# EAGLE board 24x16_RGB (EAGLE 6.4)
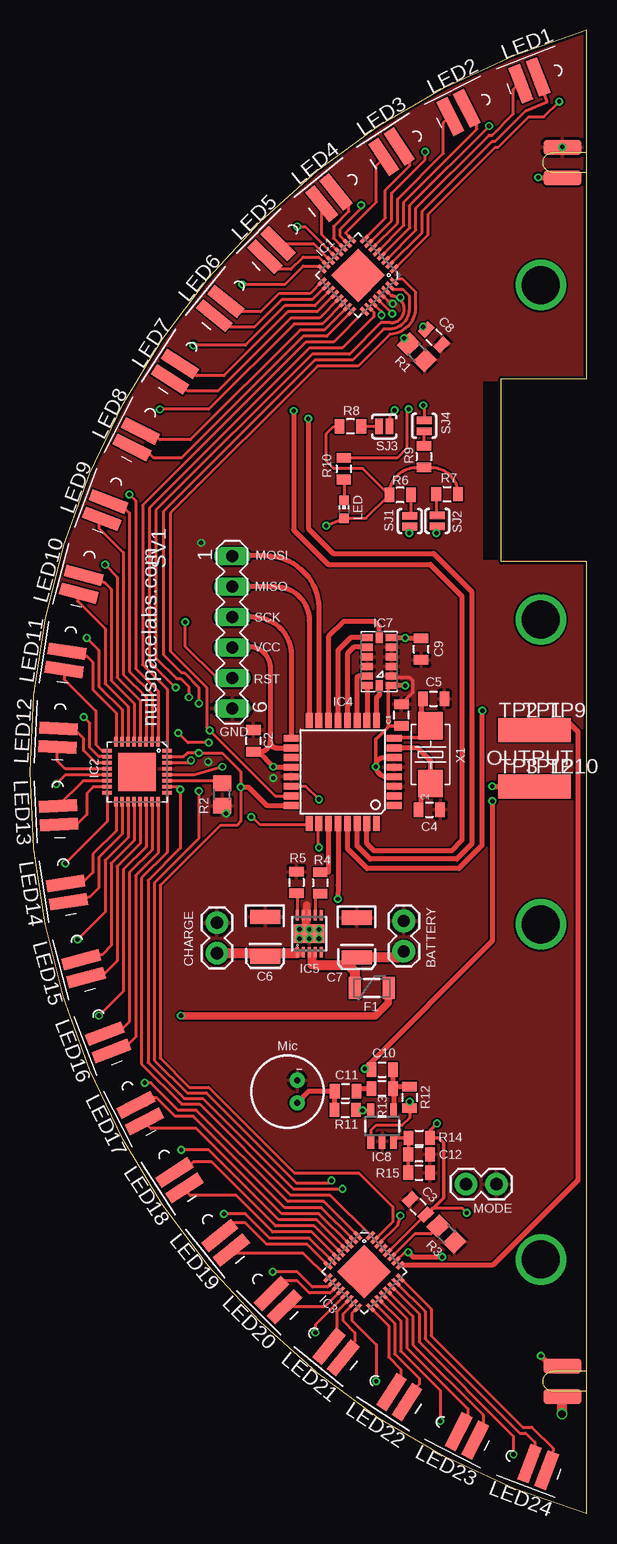
[diagram p0: board, top side]
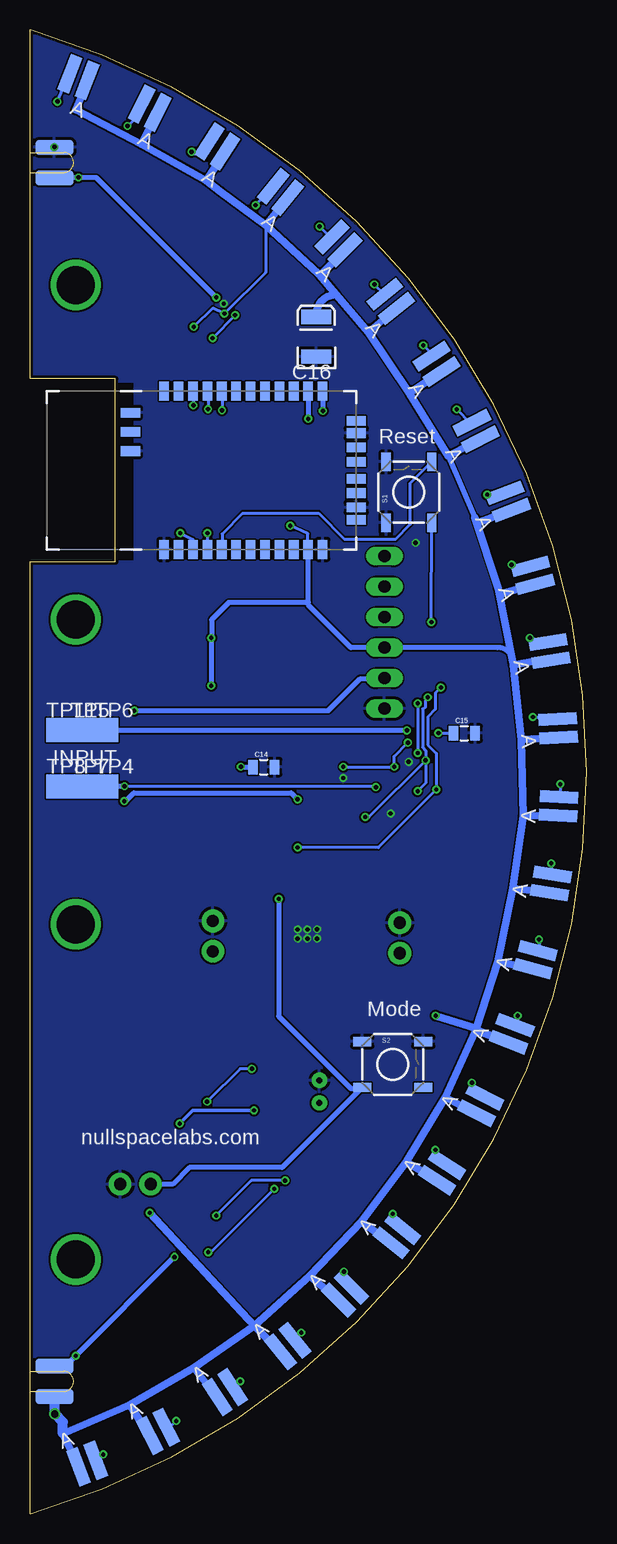
[diagram p1: board, bottom side, seen from below]

Size 46.39 x 123.7 mm. Coordinates in mm from the lower left corner, seen from the top.
Outline: 46.39,0 arc-147 46.39,123.7 46.39,94.61 39.27,94.61 39.27,79.38 46.39,79.38 46.39,0
Copper layers (1*16): Top 0.035mm / dielectric 1.5mm / Bottom 0.035mm
Design rules "ITead_rule": minimum track width 6mil, minimum drill 12mil, track to track 6mil, track to pad 6mil, pad to pad 6mil, via to via 6mil, smd to smd 0mil, copper to edge 10mil, drill to drill 10mil, minimum pad ring 10mil, minimum via ring 6mil, stop-mask expansion 2mil, vias tented up to drill 100mil, thermal gap 10mil

## Footprints (pad centres in the part's own frame; a part is rotated, then mirrored left to right if it is on the bottom)
1X02 = drill 1.016 pad 1.88: 1 0,0; 2 2.54,0
0805 = smd 0.8 x 1.2: 1 -0.9,0; 2 0.9,0
EIA3528 = smd 1.2 x 2.5: A 1.65,0; C -1.65,0
PTC-1206 = smd 1 x 1.8: 1 -1.4,0; 2 1.4,0
QFN32_XLP = smd 0.285 x 0.8: 1 -1.75,-2.5; 2 -1.25,-2.5; 3 -0.75,-2.5; 4 -0.25,-2.5; 5 0.25,-2.5; 6 0.75,-2.5; 7 1.25,-2.5; 8 1.75,-2.5; 17 1.75,2.5; 18 1.25,2.5; 19 0.75,2.5; 20 0.25,2.5; 21 -0.25,2.5; 22 -0.75,2.5; 23 -1.25,2.5; 24 -1.75,2.5 | smd 0.8 x 0.285: 9 2.5,-1.75; 10 2.5,-1.25; 11 2.5,-0.75; 12 2.5,-0.25; 13 2.5,0.25; 14 2.5,0.75; 15 2.5,1.25; 16 2.5,1.75; 25 -2.5,1.75; 26 -2.5,1.25; 27 -2.5,0.75; 28 -2.5,0.25; 29 -2.5,-0.25; 30 -2.5,-0.75; 31 -2.5,-1.25; 32 -2.5,-1.75 | smd 3.15 x 3.15: EP 0,0
TQFP32-08 = smd 1.27 x 0.559: 1 -4.293,2.8; 2 -4.293,2; 3 -4.293,1.2; 4 -4.293,0.4; 5 -4.293,-0.4; 6 -4.293,-1.2; 7 -4.293,-2; 8 -4.293,-2.8; 17 4.293,-2.8; 18 4.293,-2; 19 4.293,-1.2; 20 4.293,-0.4; 21 4.293,0.4; 22 4.293,1.2; 23 4.293,2; 24 4.293,2.8 | smd 0.559 x 1.27: 9 -2.8,-4.293; 10 -2,-4.293; 11 -1.2,-4.293; 12 -0.4,-4.293; 13 0.4,-4.293; 14 1.2,-4.293; 15 2,-4.293; 16 2.8,-4.293; 25 2.8,4.293; 26 2,4.293; 27 1.2,4.293; 28 0.4,4.293; 29 -0.4,4.293; 30 -1.2,4.293; 31 -2,4.293; 32 -2.8,4.293
DFN10_3X3 = smd 0.3 x 0.85: 1 -1,-1.55; 2 -0.5,-1.55; 3 0,-1.55; 4 0.5,-1.55; 5 1,-1.55; 6 1,1.55; 7 0.5,1.55; 8 0,1.55; 9 -0.5,1.55; 10 -1,1.55 | smd 2.48 x 1.55: EXP 0,0
RN41 = smd 0.8 x 1.6: 1 -6.6,-6.6; 2 -5.4,-6.6; 3 -4.2,-6.6; 4 -3,-6.6; 5 -1.8,-6.6; 6 -0.6,-6.6; 7 0.6,-6.6; 8 1.8,-6.6; 9 3,-6.6; 10 4.2,-6.6; 11 5.4,-6.6; 12 6.6,-6.6; 13 6.6,6.6; 14 5.4,6.6; 15 4.2,6.6; 16 3,6.6; 17 1.8,6.6; 18 0.6,6.6; 19 -0.6,6.6; 20 -1.8,6.6; 21 -3,6.6; 22 -4.2,6.6; 23 -5.4,6.6; 24 -6.6,6.6 | smd 1.6 x 0.8: 25 -9.4,4.8; 26 -9.4,3.2; 27 -9.4,1.6; 28 9.4,3.1; 29 9.4,-3.1; 30 9.4,-4.122; 31 9.4,-1.9; 32 9.4,-0.7; 33 9.4,0.7; 34 9.4,1.9; 35 9.4,4.122
LGA-14 = smd 0.6 x 0.9: 1 -2,-1; 2 -1.2,-1; 3 -0.4,-1; 4 0.4,-1; 5 1.2,-1; 6 2,-1; 8 2,1; 9 1.2,1; 10 0.4,1; 11 -0.4,1; 12 -1.2,1; 13 -2,1 | smd 0.9 x 0.6: 7 2,0; 14 -2,0
SOT23-5 = smd 0.55 x 1.2: 1 -0.95,-1.3; 2 0,-1.3; 3 0.95,-1.3; 4 0.95,1.3; 5 -0.95,1.3
CHIP-LED0603 = smd 0.8 x 0.8: A 0,-0.75; C 0,0.75
LED5MM_RGB_EDGE = smd 1 x 3.175 bottom: A -0.385,-1.6; B 1.155,-1.6 | smd 1 x 3.175: G 0.385,-1.6; R -1.155,-1.6
MIC-6MM = drill 0.5 pad 1.27: 1 -0.8,0.95; 2 -0.8,-0.95
R0805 = smd 1.3 x 1.5: 1 -0.95,0; 2 0.95,0
TACTILE_SWITCH_SMD = smd 1.524 x 0.762: 1 -2.54,1.905; 2 2.54,1.905; 3 -2.54,-1.905; 4 2.54,-1.905
SJ_2S-NO = smd 0.635 x 1.27: 1 -0.45,0; 2 0.45,0
SLOT = smd 3.175 x 1.27: P$1 2.032,1.27; P$2 2.032,-1.27 | smd 3.175 x 1.27 bottom: P$3 2.032,1.27; P$4 2.032,-1.27
MA06-1 = drill 1.016 long: 1 -6.35,0; 2 -3.81,0; 3 -1.27,0; 4 1.27,0; 5 3.81,0; 6 6.35,0
TP20SQ = smd 2 x 2: TP 0,0
5032 = smd 2.286 x 2.032: 1 -2.413,0; 2 2.413,0

## Placement (x,y rotation side)
BATTERY  [1X02]  31.15,49.43 270 top
C1  .1uF  [0805]  30.94,66.6 90 top
C2  .1uF  [0805]  18.62,64.44 90 top
C3  .1uF  [0805]  32.34,25.59 135 top
C4  18pF  [0805]  33.28,58.7 0 top
C5  18pF  [0805]  33.64,67.94 0 top
C6  4.7uF  [EIA3528]  19.59,48.11 270 top
C7  4.7uF  [EIA3528]  27.24,48.03 270 top
C8  .1uF  [0805]  33.66,98.09 315 top
C9  [0805]  32.59,72.09 90 top
C10  100pF  [0805]  29.34,37.03 0 top
C11  .1uF  [0805]  26.3,35.23 0 top
C12  1uF  [0805]  32.42,29.97 180 top
C14  .1uF  [0805]  26.91,62.26 0 bottom
C15  .1uF  [0805]  10.19,65.07 0 bottom
C16  4.7uF  [EIA3528]  22.54,98.12 90 bottom
CHARGE  [1X02]  15.58,49.28 270 top
F1  1206L150/12SLYR  [PTC-1206]  28.48,43.84 0 top
IC1  TLC5947XLP  [QFN32_XLP]  27.34,103.25 135 top
IC2  TLC5947XLP  [QFN32_XLP]  8.92,61.85 180 top
IC3  TLC5947XLP  [QFN32_XLP]  27.84,20.19 225 top
IC4  MEGA8-AI  [TQFP32-08]  26.07,61.85 180 top
IC5  MCP73123  [DFN10_3X3]  23.27,48.36 0 top
IC6  BLUETOOTH-RN41"  [RN41]  28.61,87 0 bottom
IC7  MMA7455L  [LGA-14]  29.11,71.04 90 top
IC8  OPA344  [SOT23-5]  29.34,32.33 0 top
LED  [CHIP-LED0603]  26.17,83.74 0 top
LED1  GM1WA55311A5MM_RGB_EDGE  [LED5MM_RGB_EDGE]  41.41,121.13 21 top
LED2  GM1WA55311A5MM_RGB_EDGE  [LED5MM_RGB_EDGE]  35.34,118.43 27 top
LED3  GM1WA55311A5MM_RGB_EDGE  [LED5MM_RGB_EDGE]  29.58,115.11 33 top
LED4  GM1WA55311A5MM_RGB_EDGE  [LED5MM_RGB_EDGE]  24.21,111.2 39 top
LED5  GM1WA55311A5MM_RGB_EDGE  [LED5MM_RGB_EDGE]  19.26,106.75 45 top
LED6  GM1WA55311A5MM_RGB_EDGE  [LED5MM_RGB_EDGE]  14.84,101.79 51 top
LED7  GM1WA55311A5MM_RGB_EDGE  [LED5MM_RGB_EDGE]  10.96,96.41 57 top
LED8  GM1WA55311A5MM_RGB_EDGE  [LED5MM_RGB_EDGE]  7.61,90.65 63 top
LED9  GM1WA55311A5MM_RGB_EDGE  [LED5MM_RGB_EDGE]  4.91,84.6 69 top
LED10  GM1WA55311A5MM_RGB_EDGE  [LED5MM_RGB_EDGE]  2.83,78.28 75 top
LED11  GM1WA55311A5MM_RGB_EDGE  [LED5MM_RGB_EDGE]  1.45,71.78 81 top
LED12  GM1WA55311A5MM_RGB_EDGE  [LED5MM_RGB_EDGE]  0.75,65.17 87 top
LED13  GM1WA55311A5MM_RGB_EDGE  [LED5MM_RGB_EDGE]  0.75,58.53 93 top
LED14  GM1WA55311A5MM_RGB_EDGE  [LED5MM_RGB_EDGE]  1.45,51.92 99 top
LED15  GM1WA55311A5MM_RGB_EDGE  [LED5MM_RGB_EDGE]  2.83,45.42 105 top
LED16  GM1WA55311A5MM_RGB_EDGE  [LED5MM_RGB_EDGE]  4.88,39.09 111 top
LED17  GM1WA55311A5MM_RGB_EDGE  [LED5MM_RGB_EDGE]  7.59,33.02 117 top
LED18  GM1WA55311A5MM_RGB_EDGE  [LED5MM_RGB_EDGE]  10.91,27.26 123 top
LED19  GM1WA55311A5MM_RGB_EDGE  [LED5MM_RGB_EDGE]  14.82,21.89 129 top
LED20  GM1WA55311A5MM_RGB_EDGE  [LED5MM_RGB_EDGE]  19.26,16.95 135 top
LED21  GM1WA55311A5MM_RGB_EDGE  [LED5MM_RGB_EDGE]  24.21,12.5 141 top
LED22  GM1WA55311A5MM_RGB_EDGE  [LED5MM_RGB_EDGE]  29.58,8.59 147 top
LED23  GM1WA55311A5MM_RGB_EDGE  [LED5MM_RGB_EDGE]  35.34,5.27 153 top
LED24  GM1WA55311A5MM_RGB_EDGE  [LED5MM_RGB_EDGE]  41.41,2.57 159 top
MIC1  MIC6MM  [MIC-6MM]  21.47,35.2 180 top
MODE  [1X02]  38.87,27.48 180 top
R1  20K  [R0805]  32.24,96.83 135 top
R2  20K  [R0805]  16.01,59.97 90 top
R3  20K  [R0805]  34.69,23.32 135 top
R4  1K  [0805]  24.19,52.6 270 top
R5  1.5K  [0805]  22.21,52.63 270 top
R6  1k  [0805]  30.84,84.94 180 top
R7  1k  [0805]  34.75,85.01 0 top
R8  1k  [0805]  26.7,90.65 180 top
R9  1k  [0805]  32.82,88.14 270 top
R10  220  [0805]  26.14,87.12 270 top
R11  2.2k  [0805]  26.27,33.68 0 top
R12  100K  [0805]  31.63,34.72 270 top
R13  1k  [0805]  29.34,35.46 180 top
R14  10k  [0805]  32.44,31.34 0 top
R15  10k  [0805]  32.42,28.45 0 top
S1  [TACTILE_SWITCH_SMD]  14.81,85.17 90 bottom
S2  [TACTILE_SWITCH_SMD]  16.16,37.46 0 bottom
SJ1  SOLDERJUMPERNO  [SJ_2S-NO]  31.65,82.75 90 top
SJ2  SOLDERJUMPERNO  [SJ_2S-NO]  33.94,82.78 90 top
SJ3  SOLDERJUMPERNO  [SJ_2S-NO]  29.52,90.65 180 top
SJ4  SOLDERJUMPERNO  [SJ_2S-NO]  32.85,90.7 270 top
SLOT1  SLOT  [SLOT]  46.39,11.05 180 top
SLOT2  SLOT  [SLOT]  46.39,112.65 180 top
SV1  [MA06-1]  16.85,73.48 270 top
TP1  TPTP20SQ  [TP20SQ]  42.04,65.33 0 top
TP2  TPTP20SQ  [TP20SQ]  40.04,65.33 0 top
TP3  TPTP20SQ  [TP20SQ]  40.04,60.66 0 top
TP4  TPTP20SQ  [TP20SQ]  40.04,60.66 0 bottom
TP5  TPTP20SQ  [TP20SQ]  42.04,65.33 0 bottom
TP6  TPTP20SQ  [TP20SQ]  40.04,65.33 0 bottom
TP7  TPTP20SQ  [TP20SQ]  42.04,60.66 0 bottom
TP8  TPTP20SQ  [TP20SQ]  44.02,60.66 0 bottom
TP9  TPTP20SQ  [TP20SQ]  44.05,65.33 0 top
TP10  TPTP20SQ  [TP20SQ]  44.05,60.66 0 top
TP11  TPTP20SQ  [TP20SQ]  44.05,65.33 0 bottom
TP12  TPTP20SQ  [TP20SQ]  42.04,60.66 0 top
X1  16Mhz  [5032]  33.38,63.3 270 top

## Library data of the parts
BATTERY C8-C12 CHARGE F1 IC8 R6-R15 S1 S2 SJ1-SJ4 = SparkFun
C1-C7 C14-C16 IC1-IC3 MIC1 R4 R5 = slice_noshift
IC4 = atmel; MPN: ATMEGA8-16AU; OC_FARNELL: 9171371; OC_NEWARK: 73M8863
IC5 MODE = 24x16_RGB
IC6 = NSL_Mini_Quad
IC7 = MMA7455Lbreakoutboard-v1a
LED = led
LED1-LED24 = 16x16_RGB
R1-R3 = rcl
SLOT1 SLOT2 = slice
SV1 = NSL
TP1-TP12 = testpad
X1 = NSL_MiniQuad

## Nets
!CS: IC4.14 IC7.7
BATTSENSE: IC4.1
BLANK: IC1.30 IC2.30 IC3.30 IC4.25 SLOT2.P$1 SLOT2.P$3
BT_RST: IC6.5 S1.4
BUTTON: IC4.28 MODE.2 S2.3
CHARGE: C6.A CHARGE.2 IC5.1 IC5.2
COL1: IC1.1 LED1.B
COL2: IC1.2 LED1.G
COL3: IC1.3 LED1.R
COL4: IC1.4 LED2.B
COL5: IC1.5 LED2.G
COL6: IC1.6 LED2.R
COL7: IC1.7 LED3.B
COL8: IC1.8 LED3.G
COL9: IC1.9 LED3.R
COL10: IC1.10 LED4.B
COL11: IC1.11 LED4.G
COL12: IC1.12 LED4.R
COL13: IC1.13 LED5.B
COL14: IC1.14 LED5.G
COL15: IC1.15 LED5.R
COL16: IC1.16 LED6.B
COL17: IC1.17 LED6.G
COL18: IC1.18 LED6.R
COL19: IC1.19 LED7.B
COL20: IC1.20 LED7.G
COL21: IC1.21 LED7.R
COL22: IC1.22 LED8.B
COL23: IC1.23 LED8.G
COL24: IC1.24 LED8.R
COL25: IC2.1 LED9.B
COL26: IC2.2 LED9.G
COL27: IC2.3 LED9.R
COL28: IC2.4 LED10.B
COL29: IC2.5 LED10.G
COL30: IC2.6 LED10.R
COL31: IC2.7 LED11.B
COL32: IC2.8 LED11.G
COL33: IC2.9 LED11.R
COL34: IC2.10 LED12.B
COL35: IC2.11 LED12.G
COL36: IC2.12 LED12.R
COL37: IC2.13 LED13.B
COL38: IC2.14 LED13.G
COL39: IC2.15 LED13.R
COL40: IC2.16 LED14.B
COL41: IC2.17 LED14.G
COL42: IC2.18 LED14.R
COL43: IC2.19 LED15.B
COL44: IC2.20 LED15.G
COL45: IC2.21 LED15.R
COL46: IC2.22 LED16.B
COL47: IC2.23 LED16.G
COL48: IC2.24 LED16.R
COL49: IC3.1 LED17.B
COL50: IC3.2 LED17.G
COL51: IC3.3 LED17.R
COL52: IC3.4 LED18.B
COL53: IC3.5 LED18.G
COL54: IC3.6 LED18.R
COL55: IC3.7 LED19.B
COL56: IC3.8 LED19.G
COL57: IC3.9 LED19.R
COL58: IC3.10 LED20.B
COL59: IC3.11 LED20.G
COL60: IC3.12 LED20.R
COL61: IC3.13 LED21.B
COL62: IC3.14 LED21.G
COL63: IC3.15 LED21.R
COL64: IC3.16 LED22.B
COL65: IC3.17 LED22.G
COL66: IC3.18 LED22.R
COL67: IC3.19 LED23.B
COL68: IC3.20 LED23.G
COL69: IC3.21 LED23.R
COL70: IC3.22 LED24.B
COL71: IC3.23 LED24.G
COL72: IC3.24 LED24.R
GND: BATTERY.1 C1.2 C2.2 C3.2 C4.2 C5.2 C6.C C7.C C8.2 C9.1 C12.1 C14.2 C15.2 C16.C CHARGE.1 IC1.29 IC2.29 IC3.29 IC4.3 IC4.5 IC4.21 IC5.8 IC5.9 IC5.EXP IC6.1 IC6.12 IC6.25 IC6.27 IC6.28 IC6.29 IC7.2 IC7.3 IC7.4 IC7.5 IC7.10 IC7.11 IC8.2 MIC1.2 MODE.1 R1.1 R2.1 R3.1 R5.1 R15.2 S1.1 S1.2 S2.1 S2.2 SLOT2.P$2 SLOT2.P$4 SV1.6
HOLE: IC1.27 R1.2
INT1/DRDY: IC4.13 IC7.8
INT2: IC4.12 IC7.9
MIC: C10.1 IC4.22 IC8.1 R12.2
MISO: IC4.16 SV1.2
MOSI: IC4.15 SV1.1
N$1: IC5.7 R4.2
N$2: IC2.27 R2.2
N$3: IC1.25 IC2.32
N$4: LED.C R10.2
N$5: R6.1 SJ1.2
N$6: IC5.10 R5.2
N$7: C4.1 IC4.7 X1.2
N$8: C5.1 IC4.8 X1.1
N$9: IC3.27 R3.2
N$14: C11.2 R13.2
N$15: C11.1 MIC1.1 R11.1
N$16: C12.2 IC8.3 R14.1 R15.1
N$17: C10.2 IC8.4 R12.1 R13.1
N$21: R8.1 SJ3.2
N$23: R7.1 SJ2.2
N$24: R9.1 SJ4.2
N$35: IC2.25 IC3.32
PIO3: IC6.20 SJ3.1
PIO4: IC6.22 SJ4.1
PIO5: IC6.21 R10.1
PIO6: IC6.3 SJ2.1
PIO7: IC6.4 SJ1.1
RST: IC4.29 S1.3 SV1.5
RX: IC4.30 IC6.14
SCK: IC4.17 SV1.3
SCL/SPC: IC4.10 IC7.13
SCLK: IC1.31 IC2.31 IC3.31 IC4.24 TP3.TP TP4.TP TP7.TP TP8.TP TP10.TP TP12.TP
SDA/SDI/SDO: IC4.11 IC7.12
SDO: IC4.9 IC7.14
SIN: IC1.32 IC4.23 TP5.TP TP6.TP TP11.TP
SOUT: IC3.25 TP1.TP TP2.TP TP9.TP
STAT: IC4.27 R4.1
TX: IC4.31 IC6.13
VBAT: BATTERY.2 C7.A F1.1 IC5.3 IC5.4
VCC: C1.1 C2.1 C3.1 C8.1 C9.2 C14.1 C15.1 C16.A F1.2 IC1.28 IC2.28 IC3.28 IC4.4 IC4.6 IC4.18 IC4.20 IC6.11 IC7.1 IC7.6 IC8.5 LED1.A LED2.A LED3.A LED4.A LED5.A LED6.A LED7.A LED8.A LED9.A LED10.A LED11.A LED12.A LED13.A LED14.A LED15.A LED16.A LED17.A LED18.A LED19.A LED20.A LED21.A LED22.A LED23.A LED24.A LED.A R6.2 R7.2 R8.2 R9.2 R11.2 R14.2 SLOT1.P$1 SLOT1.P$3 SV1.4
VSENSE: IC4.19
XLAT: IC1.26 IC2.26 IC3.26 IC4.26 SLOT1.P$2 SLOT1.P$4

## Tracks (layer width: path | path; a pad name or v marks a point on that pad's centre or on a via)
!CS
  Top 0.406: IC4.14 24.87,73.13 26.14,74.4 28.73,74.4 29.11,74.02 IC7.7
BLANK  (via drill 0.36)
  Top 0.254: v13.24,68.07 13.24,68.96 12.58,69.62 12.22,69.62 10.5,71.35 10.5,83.67 23.5,96.67 26.63,96.67 29.24,99.29 30.05,99.29 arc177 30.11,101.55 30.1,101.55 | v13.42,62.81 13.4,62.6 IC2.30 | IC3.30 30.62,24.03 v30.87,24.87 | v25.13,27.79 24.95,27.61 22.18,27.61 14.69,35.1 13.09,35.1 10.37,37.82 10.37,52.6 14.08,56.31 v14.08,60.25 | IC4.25 23.19,57.48 19.13,57.48 18.52,58.09 v18.45,58.09 | 30.1,101.55 IC1.30 | 30.1,101.55 30.1,101.57 v30.87,101.4 | 44.33,111.4 SLOT2.P$3
  Top 0.406: v42.35,111.4 44.33,111.4
  Bottom 0.254: v13.42,62.81 18.14,58.09 v18.45,58.09 | v14.08,60.25 13.42,60.91 v13.42,62.81 | v25.13,27.79 27.95,27.79 v30.87,24.87 | v42.35,111.4 42.37,111.38 | v13.24,68.07 13.44,67.79 13.44,67.26 13.67,67.11 13.67,63.91 13.42,63.65 v13.42,62.81
  Bottom 0.406: v30.87,101.4 40.87,111.4 v42.35,111.4 | 42.37,111.38 SLOT2.P$3
BT_RST
  Bottom 0.254: S1.4 14.69,85.93 14.69,82.5 15.91,81.28 20.2,81.28 22.33,83.41 28.66,83.41 30.38,81.69 30.38,80.42
  Bottom 0.305: 30.38,80.42 IC6.5
BUTTON  (via drill 0.36)
  Top 0.406: IC4.28 25.67,52.41 v25.66,51.26
  Bottom 0.254: 18.65,35.46 S2.3
  Bottom 0.406: v25.66,51.26 25.66,41.48 19.64,35.46 18.65,35.46 | S2.3 25.38,28.88 33.1,28.88 34.5,27.48 MODE.2
CHARGE
  Top 0.254: IC5.1 21.92,46.46 C6.A
  Top 0.305: IC5.2 IC5.1 22.27,46.74
  Top 0.813: 22.27,46.74 CHARGE.2
COL1  (via drill 0.36)
  Top 0.254: IC1.1 33.18,106.62 33.18,108.33 38.77,113.92 39.02,113.92 41.56,116.46 42.83,116.46 v44.1,117.73
  Bottom 0.254: v44.1,117.73 LED1.B
COL2
  Top 0.254: IC1.2 32.67,106.82 32.67,108.58 38.51,114.43 38.77,114.43 41.31,116.97 43.08,117.73 42.83,118.49 42.34,118.98 LED1.G
COL3
  Top 0.254: IC1.3 32.16,107.02 32.16,108.84 38.26,114.94 38.51,114.94 40.29,116.71 40.29,118.75 40.77,119.22 LED1.R
COL4  (via drill 0.36)
  Top 0.254: IC1.4 31.65,107.22 31.65,109.09 v38.26,115.7
  Bottom 0.254: v38.26,115.7 37.09,116.86 LED2.B
COL5
  Top 0.254: IC1.5 31.15,107.41 31.15,109.35 37.24,115.44 37.24,115.7 36.41,116.53 LED2.G
COL6
  Top 0.254: IC1.6 30.64,107.61 30.64,109.6 34.45,113.41 34.45,115.95 34.97,116.48 LED2.R
COL7  (via drill 0.36)
  Top 0.254: IC1.7 30.13,107.81 30.13,110.11 32.92,112.9 v32.92,113.54
  Bottom 0.254: LED3.B 32.42,113.4 32.78,113.4 v32.92,113.54
COL8
  Top 0.254: IC1.8 29.62,108.01 29.62,110.36 31.65,112.39 31.65,112.65 30.78,113.53 LED3.G
COL9
  Top 0.254: IC1.9 26.32,106.74 26.32,106.81 28.86,109.35 28.86,112.39 29.48,113.02 LED3.R
COL10  (via drill 0.36)
  Top 0.254: IC1.10 25.81,106.54 25.81,107.06 27.59,108.84 v27.59,109.09
  Bottom 0.254: 26.11,110.32 LED4.B v27.59,109.09
COL11
  Top 0.254: IC1.11 25.3,106.34 25.3,107.31 26.57,108.58 26.57,109.09 25.51,110.16 LED4.G
COL12
  Top 0.254: IC1.12 24.31,106.63 LED4.R
COL13  (via drill 0.36)
  Top 0.254: IC1.13 22.92,107.31 v22.26,107.31
  Bottom 0.254: v22.26,107.31 21.38,106.44 LED5.B
COL14
  Top 0.254: IC1.14 23.64,105.89 LED5.G
COL15
  Top 0.254: IC1.15 24.04,104.78 22.76,104.78 21.75,103.76 20.73,103.76 19.69,104.8 LED5.R
COL16  (via drill 0.36)
  Top 0.254: IC1.16 24.1,104.01 22.76,104.01 21.24,102.49 v17.68,102.49
  Bottom 0.254: v17.68,102.49 16.9,101.7 LED6.B
COL17
  Top 0.254: IC1.17 23.34,101.73 20.73,101.73 19.21,100.2 17.43,100.2 16.53,101.1 LED6.G
COL18
  Top 0.254: IC1.18 23.54,101.22 20.99,101.22 18.7,98.93 16.67,98.93 15.7,99.91 LED6.R
COL19  (via drill 0.36)
  Top 0.254: IC1.19 23.74,100.71 21.24,100.71 17.94,97.41 v13.62,97.41
  Bottom 0.254: v13.62,97.41 12.88,96.67 LED7.B
COL20
  Top 0.254: IC1.20 23.94,100.2 21.49,100.2 16.16,94.87 13.87,94.87 12.86,95.88 LED7.G
COL21
  Top 0.254: IC1.21 24.13,99.69 21.75,99.69 15.65,93.6 13.11,93.6 12.12,94.59 LED7.R
COL22  (via drill 0.36)
  Top 0.254: IC1.22 24.33,99.19 22,99.19 14.89,92.07 v10.83,92.07
  Bottom 0.254: v10.83,92.07 9.73,90.98 LED8.B
COL23
  Top 0.254: IC1.23 24.53,98.68 22.51,98.68 13.37,89.53 10.83,89.53 10.07,90.29 LED8.G
COL24
  Top 0.254: IC1.24 24.73,98.17 22.76,98.17 12.6,88.01 10.32,88.01 9.41,88.92 LED8.R
COL25  (via drill 0.36)
  Top 0.254: IC2.1 10.67,68.61 8.79,70.48 8.79,84.45 v8.29,84.96
  Bottom 0.254: v8.29,84.96 6.94,84.96 LED9.B
COL26
  Top 0.254: IC2.2 10.17,68.35 8.29,70.23 8.29,83.44 7.78,83.95 6.96,83.95 LED9.G
COL27
  Top 0.254: IC2.3 9.67,68.08 7.78,69.98 7.78,80.14 5.75,82.17 5.75,82.74 LED9.R
COL28  (via drill 0.36)
  Top 0.254: IC2.4 9.17,67.82 7.27,69.72 7.27,78.1 v6.25,79.12
  Bottom 0.254: v6.25,79.12 6.12,78.98 LED10.B
COL29
  Top 0.254: IC2.5 8.67,67.56 6.76,69.47 6.76,77.09 6.25,77.6 LED10.G
COL30
  Top 0.254: IC2.6 8.17,67.3 6.25,69.22 6.25,73.79 3.97,76.07 3.97,76.64 LED10.R
COL31  (via drill 0.36)
  Top 0.254: IC2.7 7.67,67.04 5.75,68.96 5.75,72.01 v4.73,73.02
  Bottom 0.254: LED11.B v4.73,73.02
COL32
  Top 0.254: IC2.8 7.17,66.77 5.24,68.71 5.24,70.99 4.73,71.5 3.5,71.5 LED11.G
COL33
  Top 0.254: IC2.9 6.03,63.6 5.49,64.13 5.49,66.93 2.85,69.57 LED11.R
COL34  (via drill 0.36)
  Top 0.254: IC2.10 6.4,63.12 5.75,63.12 4.98,63.88 4.98,65.91 v4.48,66.42
  Bottom 0.254: v4.48,66.42 2.59,66.42 LED12.B
COL35
  Top 0.254: LED12.G 2.44,65.41 3.71,65.41 4.48,64.64 4.48,63.63 5.5,62.6 IC2.11
COL36
  Top 0.254: IC2.12 2.95,62.1 2.29,62.76 LED12.R
COL37  (via drill 0.36)
  Top 0.254: IC2.13 2.95,61.59 v2.19,60.83
  Bottom 0.254: v2.19,60.83 2.19,59.76 LED13.B
COL38
  Top 0.254: 6.42,61.09 IC2.14 4.43,61.1 LED13.G
COL39
  Top 0.254: LED13.R 3.89,57.46 4.73,58.29 4.73,60.07 5.26,60.6 IC2.15
COL40  (via drill 0.36)
  Top 0.254: IC2.16 6.42,57.7 v2.95,54.23
  Bottom 0.254: v2.95,54.23 2.95,53.41 LED14.B
COL41
  Top 0.254: IC2.17 7.17,56.92 5.24,54.99 5.24,53.47 4.48,52.7 3.13,52.7 LED14.G
COL42
  Top 0.254: IC2.18 7.67,56.66 5.75,54.74 5.75,52.2 4.98,51.43 LED14.R
COL43  (via drill 0.36)
  Top 0.254: IC2.19 8.17,56.4 6.25,54.48 6.25,50.16 v3.97,47.88
  Bottom 0.254: v3.97,47.88 3.97,47.05 LED15.B
COL44
  Top 0.254: IC2.20 8.67,56.14 6.76,54.23 6.76,47.37 6,46.61 4.68,46.61 LED15.G
COL45
  Top 0.254: IC2.21 9.17,55.88 7.27,53.97 7.27,46.1 6.25,45.08 5.05,45.08 LED15.R
COL46  (via drill 0.36)
  Top 0.254: IC2.22 9.67,55.61 7.78,53.72 7.78,43.56 v5.75,41.53
  Bottom 0.254: v5.75,41.53 5.75,40.96 LED16.B
COL47
  Top 0.254: IC2.23 10.17,55.35 8.29,53.47 8.29,41.02 7.78,40.51 6.73,40.51 LED16.G
COL48
  Top 0.254: IC2.24 10.67,55.09 8.79,53.21 8.79,39.75 8.03,38.99 7.19,38.99 LED16.R
COL49  (via drill 0.36)
  Top 0.254: IC3.1 24.48,26.03 21.49,26.03 13.87,33.66 12.35,33.66 10.06,35.94 v9.56,35.94
  Bottom 0.254: v9.56,35.94 9.56,35.84 arc-90 LED17.B
COL50
  Top 0.254: IC3.2 24.28,25.53 21.24,25.53 13.62,33.15 12.1,33.15 10.57,34.67 10.32,34.67 9.74,34.09 LED17.G
COL51
  Top 0.254: IC3.3 24.08,25.02 20.99,25.02 13.87,32.13 10.06,32.13 9.54,32.66 LED17.R
COL52  (via drill 0.36)
  Top 0.254: IC3.4 23.88,24.51 20.73,24.51 14.89,30.35 v12.6,30.35
  Bottom 0.254: v12.6,30.35 12.6,30.09 arc-90 LED18.B
COL53
  Top 0.254: IC3.5 23.68,24 20.48,24 15.14,29.34 13.62,29.34 12.74,28.46 LED18.G
COL54
  Top 0.254: IC3.6 23.48,23.49 20.22,23.49 17.18,26.54 13.37,26.54 12.88,27.03 LED18.R
COL55  (via drill 0.36)
  Top 0.254: IC3.7 23.28,22.99 19.97,22.99 17.94,25.02 v16.16,25.02
  Bottom 0.254: v16.16,25.02 16.16,24.62 arc-90 LED19.B
COL56
  Top 0.254: IC3.8 23.08,22.48 19.72,22.48 17.94,24.26 16.92,24.26 15.86,23.19 LED19.G
COL57
  Top 0.254: IC3.9 22.78,21.72 17.18,21.72 16.9,22 LED19.R
COL58  (via drill 0.36)
  Top 0.254: IC3.10 24.81,18.92 23.53,18.92 22.26,20.19 v20.22,20.19
  Bottom 0.254: v20.22,20.19 20.22,19.54 arc-90 LED20.B
COL59
  Top 0.254: IC3.11 25.01,18.41 23.27,18.41 22.26,19.43 21.24,19.43 20.16,18.35 LED20.G
COL60
  Top 0.254: IC3.12 24.56,17.26 LED20.R
COL61  (via drill 0.36)
  Top 0.254: IC3.13 23.78,15.77 v23.78,15.11
  Bottom 0.254: v23.78,15.11 24.31,14.58 LED21.B
COL62
  Top 0.254: IC3.14 25.56,16.85 25.56,15.11 24.91,14.47 LED21.G
COL63
  Top 0.254: IC3.15 26.07,16.65 26.07,16.13 27.08,15.11 27.08,14.35 26.11,13.38 LED21.R
COL64  (via drill 0.36)
  Top 0.254: IC3.16 26.83,16.7 26.83,16.13 28.86,14.1 v28.86,11.05
  Bottom 0.254: v28.86,11.05 29.35,10.56 LED22.B
COL65
  Top 0.254: IC3.17 29.88,15.69 29.88,13.08 30.89,12.06 30.89,11.3 30.13,10.54 LED22.G
COL66
  Top 0.254: IC3.18 30.38,15.88 30.38,13.33 32.42,11.3 32.42,10.79 31.42,9.8 LED22.R
COL67  (via drill 0.36)
  Top 0.254: IC3.19 30.89,16.08 30.89,13.59 34.19,10.29 v34.19,7.75
  Bottom 0.254: v34.19,7.75 34.72,7.22 LED23.B
COL68
  Top 0.254: IC3.20 31.4,16.28 31.4,13.84 36.48,8.76 36.48,8.25 35.72,7.5 LED23.G
COL69
  Top 0.254: IC3.21 31.91,16.48 31.91,14.1 37.75,8.25 37.75,7.49 37.09,6.84 LED23.R
COL70  (via drill 0.36)
  Top 0.254: IC3.22 32.42,16.68 32.42,14.35 40.29,6.48 v40.29,4.95
  Bottom 0.254: v40.29,4.95 40.77,4.47 LED24.B
COL71
  Top 0.254: IC3.23 32.92,16.88 32.92,14.6 40.8,6.73 41.31,6.73 42.07,5.97 42.07,5.46 41.62,5.02 LED24.G
COL72
  Top 0.254: IC3.24 33.43,17.08 33.43,14.86 41.05,7.24 41.81,7.24 43.59,5.46 43.59,5.21 43.06,4.68 LED24.R
GND  (via drill 0.36)
  Top 0.254: v30.23,100.89 30.05,100.89 IC1.29 | IC7.2 30.13,69.83 | 23.04,50.75 23.04,50.18 arc-90 IC5.9
  Top 0.305: C1.2 31.91,68.45 31.91,69.47 31.65,69.72 30.24,69.72 IC7.2
  Top 0.61: v23.27,48.72 22.99,49 22.99,49.43 23.04,49.48 23.04,50.75
  other vias: 16.34,58.39 14.84,62.69 22.46,48.74 24.09,48.72 22.46,47.96 23.27,47.96 24.09,47.96 44.35,113.94 14.26,80.95 20.28,61.34
  pour Top: 47.86,124.69 47.73,124.69 47.73,94.64 37.6,94.51 37.6,79.38 47.73,79.5 47.86,-1.5 -2.05,-1.47 -2.05,124.71
  pour Bottom: -3.65,127.13 -3.65,-5.49 48.29,-5.36 48.29,79.35 37.6,79.43 37.6,94.34 48.47,94.41 48.47,95.07 48.65,127.25 48.29,127.25
HOLE  (via drill 0.36)
  Top 0.254: IC1.27 29.24,100.28 v29.29,99.92 | v31.17,98.02 31.57,97.62 R1.2
  Bottom 0.254: v29.29,99.92 31.15,98.02 v31.17,98.02
INT1/DRDY
  Top 0.406: IC4.13 25.66,71.98 26.72,73.04 IC7.8
INT2
  Top 0.406: IC4.12 26.45,66.16 26.45,71.7 26.99,72.24 IC7.9
MIC  (via drill 0.36)
  Top 0.254: IC8.1 28.4,31.98 28.81,32.38 30.99,32.38 31.63,33.02 R12.2 v31.63,34.37 | v27.9,37.11 27.97,37.03 C10.1 | v24.09,59.56 23,60.65 IC4.22
  Top 0.406: v27.9,37.11 38.54,47.75 v38.54,59.41
  Bottom 0.254: v31.63,34.37 28.89,37.11 v27.9,37.11 | v38.54,59.41 38.39,59.56
  Bottom 0.406: v24.09,59.56 24.62,60.1 37.73,60.1 38.41,59.41 v38.54,59.41
MISO
  Top 0.406: IC4.16 23.27,74.5 arc90 20.48,77.29 SV1.2
MOSI
  Top 0.406: IC4.15 24.07,75.46 arc90 19.64,79.88 16.9,79.88 arc90 SV1.1
N$1
  Top 0.254: IC5.7 23.77,51.7 R4.2
N$2
  Top 0.254: IC2.27 15.83,61.1 R2.2
N$3
  Top 0.254: IC1.25 25.31,97.69 22.99,97.69 9.38,84.07 9.38,70.79 11.42,68.75 IC2.32
N$4
  Top 0.254: LED.C 26.17,86.2 R10.2
N$5
  Top 0.254: R6.1 31.74,83.29 arc-90 SJ1.2
N$6
  Top 0.254: IC5.10 22.27,51.73 R5.2
N$7
  Top 0.406: IC4.7 32.32,63.85 33.41,62.76 33.41,60.91 X1.2 33.38,60.76 32.57,59.94 32.57,58.89 C4.1
N$8
  Top 0.305: IC4.8 30.43,64.72 32.67,64.72 33.38,65.43 X1.1
  Top 0.406: IC4.8 | X1.1 33.38,65.76 32.59,66.55 32.59,67.83 C5.1
N$9
  Top 0.254: IC3.27 32.05,23.34 33.41,23.34 34.02,23.96 R3.2
N$10  (via drill 3.17)
  other vias: 42.58,21.21
N$11  (via drill 3.17)
  other vias: 42.58,49.15
N$12  (via drill 3.17)
  other vias: 42.58,102.44
N$13  (via drill 3.17)
  other vias: 42.58,74.55
N$14
  Top 0.406: C11.2 27.42,35.46 R13.2
N$15
  Top 0.406: R11.1 25.37,35.2 C11.1 23.19,35.23 MIC1.1
N$16
  Top 0.305: R15.1 C12.2 31.54,30 R14.1 30.6,31.34 IC8.3
N$17
  Top 0.406: C10.2 R13.1 | R13.1 30.41,35.62 R12.1 | R13.1 30.29,35.41 IC8.4
N$21
  Top 0.254: SJ3.2 R8.1
N$23
  Top 0.254: R7.1 33.85,83.32 arc90 SJ2.2
N$24
  Top 0.254: SJ4.2 32.82,90.23 R9.1
N$35
  Top 0.254: IC2.25 11.42,55.15 9.28,53.01 9.28,37.52 12.63,34.16 14.13,34.16 21.7,26.59 24.98,26.59 IC3.32
PIO3  (via drill 0.36)
  Top 0.254: v30.38,92 29.97,91.58 SJ3.1
  Bottom 0.254: IC6.20 30.38,93.57 v30.38,92
PIO4  (via drill 0.36)
  Top 0.254: v32.77,92.41 32.85,92.33 SJ4.1
  Bottom 0.254: IC6.22 32.77,93.56 v32.77,92.41
PIO5  (via drill 0.36)
  Top 0.254: R10.1 30.6,88.02 31.4,88.82 31.4,91.95 v31.55,92.1
  Bottom 0.254: v31.55,92.1 31.55,93.54 IC6.21
PIO6  (via drill 0.36)
  Top 0.254: SJ2.1 v33.86,81.76
  Bottom 0.254: IC6.3 32.81,81.22 arc90 32.8,81.23 v33.86,81.76
PIO7  (via drill 0.36)
  Top 0.254: v31.6,81.76 31.6,82.25 SJ1.1
  Bottom 0.254: IC6.4 v31.61,81.76 v31.6,81.76
RST  (via drill 0.36)
  Top 0.254: v12.93,74.35 12.93,72.31 15.5,69.75 16.77,69.75 SV1.5
  Top 0.406: IC4.29 26.47,55.43 28.1,53.8 35.74,53.8 37.65,55.7 37.65,66.9 v37.7,66.95
  Bottom 0.254: v12.93,74.35 S1.3
  Bottom 0.406: v37.7,66.95 21.52,66.95 18.85,69.62 16.9,69.62 SV1.5
RX  (via drill 0.36)
  Top 0.406: IC4.30 27.26,55.68 28.35,54.58 35.57,54.58 36.81,55.83 36.81,76.89 33.64,80.06 25.28,80.06 23.2,82.14 v23.2,91.29
  Bottom 0.406: v23.2,91.29 v23.21,91.3 IC6.14
SCK
  Top 0.406: IC4.17 21.77,71.6 arc90 18.6,74.78 16.87,74.78 arc90 SV1.3
SCL/SPC
  Top 0.406: IC4.10 28.11,66.19 IC7.13
SCLK  (via drill 0.36)
  Top 0.254: v14.08,67.56 14.08,68.88 12.83,70.13 12.6,70.13 11.11,71.63 11.11,83.57 23.73,96.19 26.88,96.19 29.47,98.78 29.88,98.78 arc90 31.63,100.46 31.63,101.52 31.12,102.03 30.31,102.03 30,102.34 30,102.37 IC1.31 | IC2.31 12.78,63.1 12.78,63.12 13.09,63.42 v14.08,63.42 16.01,63.42 17.56,61.87 v17.56,60.58 17.56,57.71 17.25,57.4 15.86,57.4 10.85,52.4 10.85,38 13.29,35.56 14.89,35.56 22.03,28.42 27.41,28.42 30.23,25.6 30.23,24.35 IC3.31 | TP3.TP TP12.TP TP8.TP TP10.TP
  Top 0.406: IC4.24 19.72,59.05 18.19,60.58 v17.56,60.58 | v38.51,60.65 TP3.TP
  Bottom 0.254: v38.51,60.65 17.61,60.63 arc90 v17.56,60.58 | TP3.TP TP12.TP | v14.08,67.56 v14.08,63.42
  Bottom 0.406: TP3.TP v38.51,60.65 TP8.TP
SDA/SDI/SDO
  Top 0.406: IC4.11 27.23,66.17 27.23,69.72 27.36,69.84 IC7.12
SDO
  Top 0.406: IC7.14 29.11,68.27 28.87,68.03 IC4.9
SIN  (via drill 0.36)
  Top 0.254: IC1.32 30.54,102.92 31.07,102.92 32.16,101.83 32.16,100.74 arc-90 30,98.35 27.34,95.68 23.96,95.68 11.69,83.41 11.69,71.91 14.71,68.88 14.71,65.58 v14.98,65.32 20.45,59.85 IC4.23
  Bottom 0.254: TP5.TP TP6.TP | TP5.TP TP11.TP | TP5.TP 43.02,65.33 43.02,65.32
  Bottom 0.406: v14.98,65.32 43.02,65.32
SOUT
  Top 0.254: 44.84,66.02 44.74,66.02 TP9.TP TP1.TP TP2.TP
  Top 0.406: IC3.25 38.56,20.72 45.65,27.81 45.65,65.2 44.84,66.02
STAT
  Top 0.406: IC4.27 24.87,53.5 R4.1
TX  (via drill 0.36)
  Top 0.406: IC4.31 28.07,55.88 28.68,55.27 35.11,55.27 36,56.16 36,76.5 33.36,79.15 24.85,79.15 21.98,82.02 v21.98,91.95
  Bottom 0.406: v21.98,91.95 22.01,91.98 IC6.13
VBAT
  Top 0.254: IC5.3 IC5.4 23.78,45.72 | 23.45,45.72 23.27,45.9 IC5.3 | IC5.3 23.45,46.63 23.45,45.97 23.6,46.13 23.6,46.63 23.27,46.3 23.27,45.69
  Top 0.305: IC5.3 IC5.4
  Top 0.61: 23.78,45.72 23.45,45.72
  Top 0.813: BATTERY.2 30.64,46.38 C7.A 26.57,45.72 | 26.57,45.72 23.78,45.72 | 26.57,45.72 27.08,45.21 F1.1
VCC  (via drill 0.36, 0.6)
  Top 0.254: IC2.28 13.7,61.6 v16.03,62.28 | v20.28,62.28 arc90 20.31,62.25 | v28.81,62.28 28.73,62.28 | v30.18,100.05 IC1.28 | v32.75,98.96 C8.1 | IC3.28 29.81,21.78 C3.1 | C3.1 32.97,25.09 | v36.4,25.09 36.02,25.48 33.48,25.48 32.97,24.97 C3.1 | R7.2 arc90 33.43,87.24 R9.2 32.24,87.24 arc90 R6.2 | v24.69,82.37 LED.A 28,82.99 R6.2 | R6.2 27.73,87.15 25.3,87.15 24.69,87.76 24.69,90.04 25.28,90.63 25.78,90.63 R8.2 | 29.88,43.74 F1.2 | IC4.6 arc-90 30.48,63.17 | v12.35,65.1 13.16,64.29 v14.89,64.29
  Top 0.305: C3.1 33.11,24.95 34.5,26.34 34.5,30.91 34.07,31.34 R14.2 33.34,31.96 v33.92,32.54 | IC7.1 29.85,68.78 29.85,65.68 | v28.81,62.28 28.81,64.59 28.84,64.59 29.85,65.61 29.85,65.68 | C1.1 30.93,65.68 29.85,65.68
  Top 0.406: 20.02,64.39 arc90 20.56,63.85 IC4.18 | 20.02,64.39 20.02,70.51 arc99 17.94,72.29 | 17.94,72.29 arc-10 SV1.4 17.94,72.29 | 19.02,63.54 v20.28,62.28 | 19.02,63.54 C2.1 | IC7.6 30.13,73.02 v31.27,73.02 32.55,73.02 C9.2 | IC7.1 v31.27,69.04 | R11.2 27.22,33.63 v27.72,33.63 IC8.5 | 20.31,62.25 IC4.20 21.81,62.28 | 19.02,63.54 19.17,63.54 arc90 20.02,64.39 | IC4.6 29.45,63.05 arc90 v28.81,62.28 arc90 29.92,61.45 IC4.4
  Top 0.61: v12.58,41.53 28.78,41.53 29.85,42.6 29.85,43.71 29.88,43.74
  Top 0.813: SLOT1.P$1 44.35,8.36 v44.33,8.33
  Bottom 0.254: v20.28,62.28 v16.03,62.28 16.03,63.14 v14.89,64.29 | v32.75,98.96 31.15,100.51 v30.18,100.05 26.75,103.48 26.75,107.44 | IC6.11 23.22,81.71 v24.69,82.37 | C15.1 11.12,65.1 v12.35,65.1
  Bottom 0.305: 4.43,70.84 4.11,71.15 LED11.A | v33.92,32.54 32.82,33.63 v27.72,33.63
  Bottom 0.406: 42.07,118.24 LED1.A | 22.21,103.25 22.31,103.35 | 11.54,88.16 9.31,83.05 9.1,82.57 | 7.38,77.15 7.22,76.66 | 6.13,70.76 6.17,71 arc-90 7.41,72.24 7.41,72.21 SV1.4 19.64,72.21 23.2,75.77 23.2,75.97 | 9.25,40.33 9.3,40.22 | IC6.11 23.2,80.38 23.2,75.97 | 23.2,75.97 29.83,75.97 31.25,74.55 31.25,73.05 v31.27,73.02 v31.27,69.04 | C14.1 27.83,62.28 v28.81,62.28
  Bottom 0.61: 42.07,118.24 42.58,117.04 37.12,114.17 | 37.12,114.17 LED2.A | 31.71,111.12 LED3.A | 31.71,111.12 37.12,114.17 | 26.75,107.44 LED4.A | 26.75,107.44 30.57,110.28 31.71,111.12 | LED5.A 22.21,103.25 20.85,101.63 arc-90 22.54,99.94 C16.A | 26.75,107.44 22.31,103.35 18.22,98.53 | 18.22,98.53 LED6.A | 14.76,93.45 LED7.A | 18.22,98.53 14.76,93.45 | LED8.A 11.54,88.16 14.76,93.45 | 9.1,82.57 LED9.A | 7.22,76.66 LED10.A | 9.31,83.05 7.38,77.15 6.17,71 | 4.11,71.15 6.13,70.76 5.44,64.57 | 5.44,64.57 LED12.A | 5.29,58.17 LED13.A | 5.44,64.57 5.29,58.17 | 6.15,52.12 LED14.A | 5.29,58.17 6.15,52.12 | 7.4,46.02 LED15.A | 6.15,52.12 7.4,46.02 | LED16.A 9.25,40.33 9.21,40.46 | 7.4,46.02 9.21,40.46 | 11.77,34.72 LED17.A | 9.3,40.22 11.77,34.72 | 15.04,29.34 LED18.A | 11.77,34.72 15.04,29.34 | 18.8,24.36 LED19.A | 15.04,29.34 18.8,24.36 | 23.07,19.84 LED20.A | 18.8,24.36 23.07,19.84 | 27.69,15.7 LED21.A | 23.07,19.84 27.69,15.7 | 32.75,12.17 LED22.A | 27.69,15.7 32.75,12.17 | 38.06,9.09 LED23.A | 32.75,12.17 38.06,9.09 | LED24.A 43.64,6.68 38.06,9.09 | 27.69,15.7 v36.4,25.09 | 12.6,41.55 v12.58,41.53 9.21,40.46
  Bottom 0.813: SLOT1.P$1 44.33,9.75 v44.33,8.33 43.64,7.64 43.64,6.68
XLAT  (via drill 0.36)
  Top 0.254: IC1.26 28.66,100.16 28.66,99.8 26.04,97.18 23.27,97.18 9.94,83.84 9.94,71.07 12.12,68.88 v12.15,68.88 | IC2.26 12.55,60.6 v12.53,60.38 12.53,55.5 9.84,52.81 9.84,37.62 12.83,34.62 14.41,34.62 21.93,27.1 v26.04,27.1 | v31.53,21.82 31.24,21.82 IC3.26 | IC4.26 24.03,57.52 24.03,55.6 arc90 v24.09,55.55 | 43.44,12.32 SLOT1.P$2
  Top 0.406: v31.53,21.82 31.93,21.41 v34.35,21.41 | v42.58,13.18 43.44,12.32
  Bottom 0.254: v26.04,27.1 31.32,21.82 v31.53,21.82 | v24.09,55.55 17.35,55.55 v12.53,60.38 12.53,63.4 13.24,64.11 13.24,66.45 12.6,67.08 12.6,68.43 v12.15,68.88 | 43.44,12.32 SLOT1.P$2
  Bottom 0.406: v34.35,21.41 v42.58,13.18 43.44,12.32

## Text on the board
tPlace: MOSI | MISO | SCK | VCC | RST | nullspacelabs.com | GND | OUTPUT | Mic
bPlace: Reset | INPUT | Mode | nullspacelabs.com